# Altium PCB PCB1.PcbDoc
Units mm, origin at the board's own origin, x right, y up, seen from the top; angles counter-clockwise.
Board outline 26.04 x 30.99 mm, 2 copper layers (Top Layer, Bottom Layer); 13 components, 11 nets, 60 pads, 12 vias.
Unrouted connection lines stored in the file: 1.
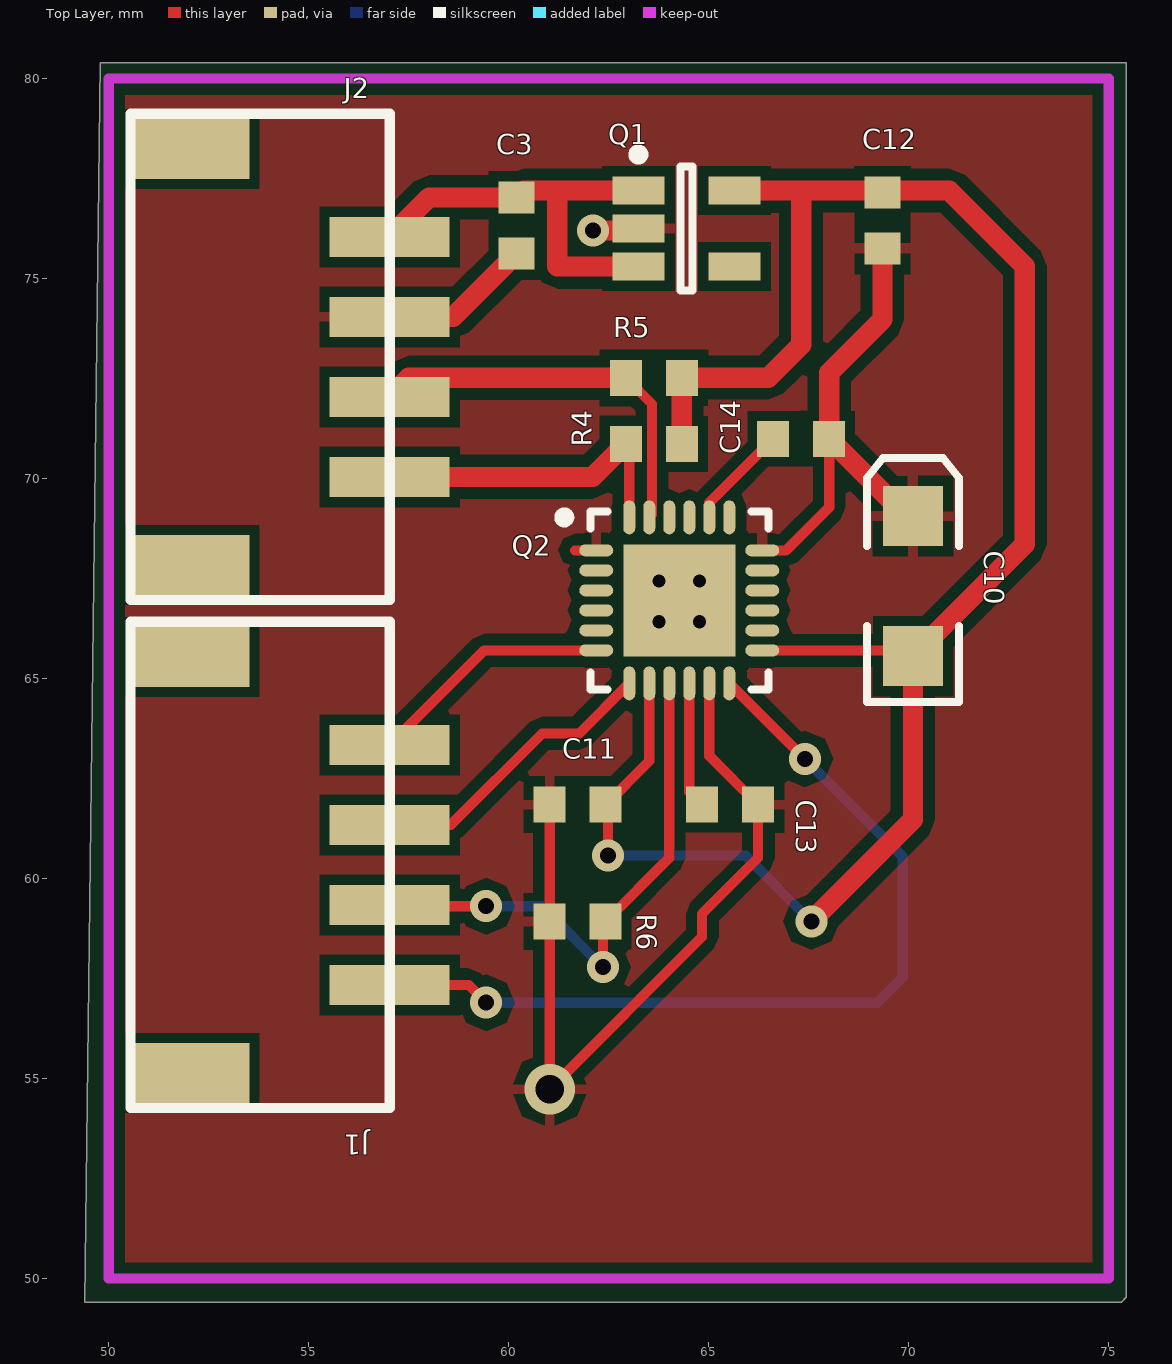
[diagram p0: Top Layer view]
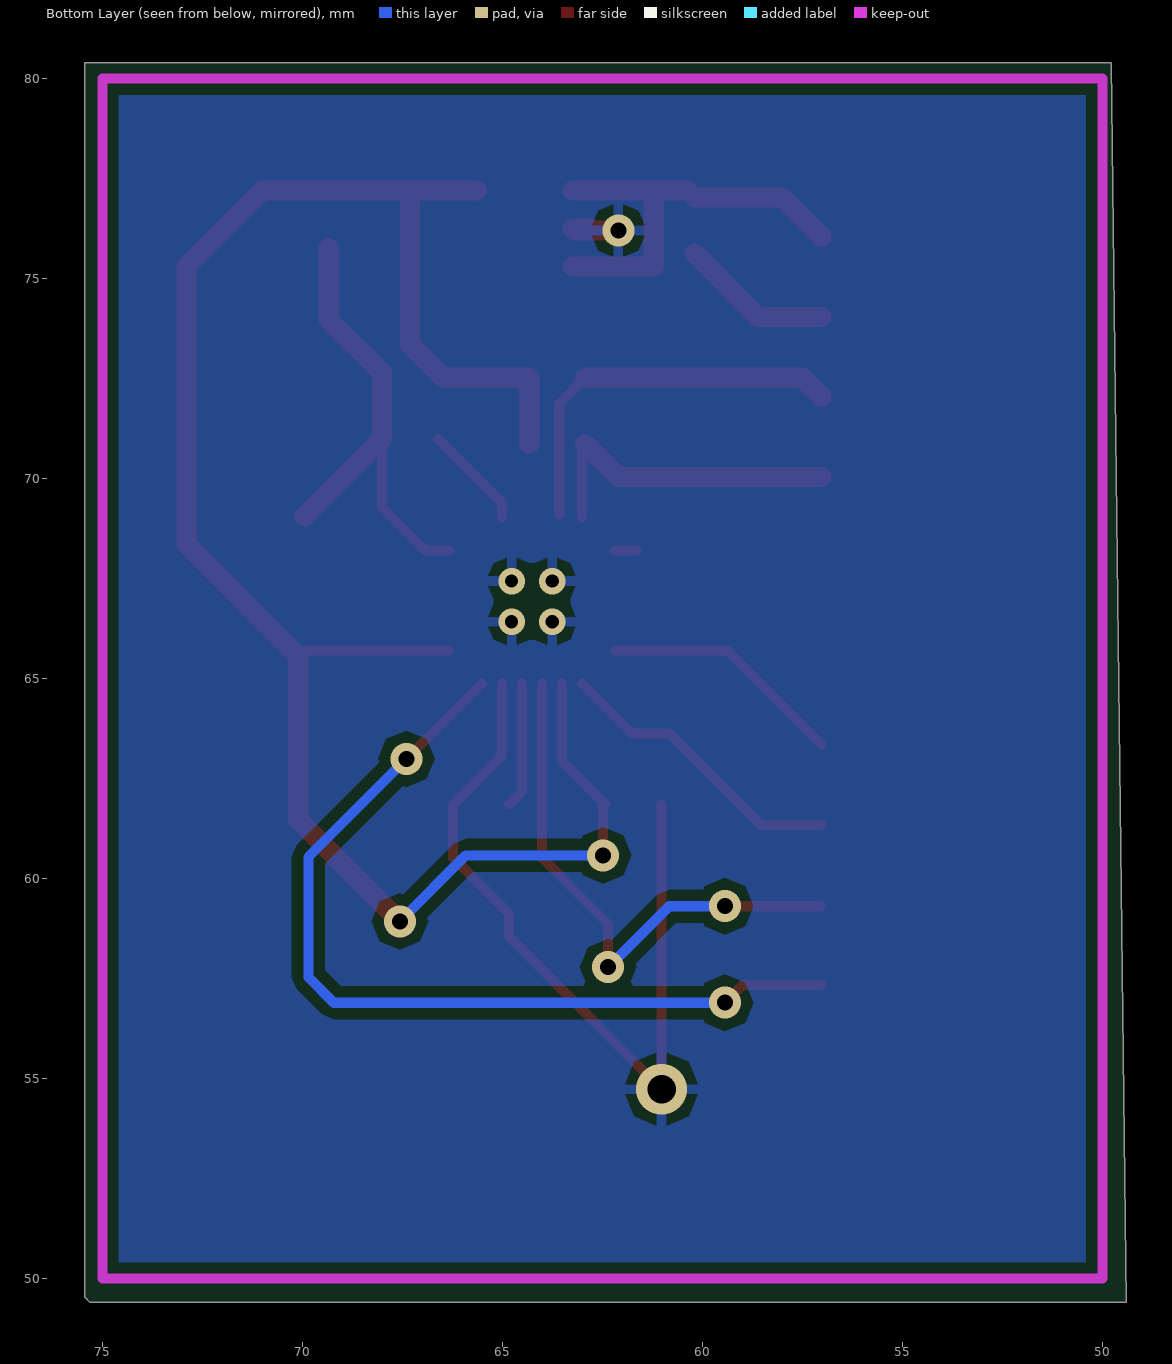
[diagram p1: Bottom Layer view, seen from below]

## Layer stack, top to bottom
Top Layer: signal copper 0.0356
Dielectric: dielectric 0.32, FR-4, Dk 4.8
Bottom Layer: signal copper 0.0356

## Board outline
49.784,80.391 75.438,80.391 75.438,49.53 75.311,49.403 49.403,49.403

## Design rules (kind name [scope] priority, off if disabled: settings)
Clearance [All] p1 off: gap=0.254
ComponentClearance [All] p1 off: gap=0 collisioncheckmode=3 verticalgap=0 showdistances=FALSE
Height [All] p1 off: minheight=0 maxheight=25.4 prefheight=12.7
PolygonConnect [All] p1: connectstyle=Relief reliefconductorwidth=0.254 reliefentries=4 polygonreliefangle="90 Angle"
RoutingVias [All] p1: holewidth=0.711 width=1.27 viastyle="Through Hole" minholewidth=0.711 minwidth=1.27 maxholewidth=0.711 maxwidth=1.27
SilkscreenOverComponentPads [All] p1: minsilkscreentomaskgap=0.254
SolderMaskExpansion [All] p1: expansion=0.102
Width [All] p1: maxlimit=1.27 minlimit=0.254 preferedwidth=0.254
25 further rules are at their usual default settings.

## Components (designator, comment, footprint, x,y, rotation, side; value= is the part's Value field where it differs from the comment)
C3 "4.7u" 1608[0603] 60.198,76.327 r270 top
C10 "10u" 3.2X1.6X1.1 70.104,67.31 r90 top
C11 "0.1u" 1608[0603] 61.722,61.849 r0 top
C12 "0.1u" 1608[0603] 69.342,76.454 r270 top
C13 "0.1u" 1608[0603] 65.532,61.849 r0 top
C14 "2200p" 1608[0603] 67.31,70.993 r0 top
J1 "CON1" SH-3 57.023,61.341 r270 top
J2 "CON2" SH-3 57.023,74.041 r270 top
Q1 "3.3V  LDO" SOT235 63.246,78.105 r0 top (schematic designator *)
Q2 "Component_1" MPU6050 64.262,66.929 r0 top (schematic designator *)
R4 "4.7K" 1608[0603] 63.627,70.866 r0 top
R5 "4.7K" 1608[0603] 63.627,72.517 r0 top
R6 "4.7K" 1608[0603] 61.722,58.928 r0 top

## Footprints (in the part's own frame and the unit in brackets; to place one, negate y for a bottom-side part, rotate by r counter-clockwise, add the part's x,y. Pads: shape width x height; smd on the part's side, far side on the other; paste and mask are expansions set on the pad)
3.2X1.6X1.1 [mm] "SMT LED; 2 Flat Leads"
  rect 1.5x1.5 smd: 1(-1.75,0) 2(1.75,0)
  silkscreen extent -2.9,-1.15 3.2,1.15
1608[0603] [mm] "Chip Capacitor, Body 1.6x0.8mm, IPC High Density"
  rect 0.8x0.9 smd: 1(-0.7,0) 2(0.7,0)
  body extent -0.87,-0.48 0.87,0.48, height 1.3
MPU6050 [mm]
  oval 0.85x0.3 smd: 1(-2.075,1.275) 2(-2.075,0.775) 3(-2.075,0.275) 4(-2.075,-0.225) 5(-2.075,-0.725) 6(-2.075,-1.225) 13(2.075,-1.225) 14(2.075,-0.725) 15(2.075,-0.225) 16(2.075,0.275) 17(2.075,0.775) 18(2.075,1.275)
  oval 0.3x0.85 smd: 7(-1.25,-2.05) 8(-0.75,-2.05) 9(-0.25,-2.05) 10(0.25,-2.05) 11(0.75,-2.05) 12(1.25,-2.05) 19(1.25,2.1) 20(0.75,2.1) 21(0.25,2.1) 22(-0.25,2.1) 23(-0.75,2.1) 24(-1.25,2.1)
  rect 2.8x2.8 smd: 25(0,0.025)
  silkscreen extent -3,-2.2 2.22,2.25, body extent -2.07,-2.05 2.07,2.1, height 1
SH-3 [mm]
  rect 1x3 smd: 1(-2,0) 2(0,0) 3(2,0) 4(4,0)
  rect 1.5x3 smd: GND(-4.2,-5) GND(6.2,-5)
  silkscreen extent -5.08,-6.48 7.08,0
SOT235 [mm]
  rect 1.3x0.7 smd: 1(-0.006,-0.904) 2(-0.006,-1.854) 3(-0.006,-2.804) 4(2.394,-2.804) 5(2.394,-0.904)
  silkscreen extent -0.13,-3.4 1.34,0.12, body extent 0.29,-3.4 2.09,-0.3, height 1.45

## Part data
C3 C10 C11 C12 C13 C14: library part CAP-0.1UF, "SMD-CAP"
J1 J2: library part "Header 4", "Header, 4"
Q1: library part 3.3V
Q2: library part Compone
R4 R5 R6: library part Res1, "Resistor"

## Via types
v1: diameter 0.8, hole 0.4, Top Layer to Bottom Layer, 7 vias
v2: diameter 0.66, hole 0.33, Top Layer to Bottom Layer, 4 vias
v3: diameter 1.27, hole 0.711, Top Layer to Bottom Layer, 1 vias

## Nets (pads, with @x,y where several pads share a name; then routed paths per layer and width w, separated by ;. In a path a pad name is that pad's centre, name@x,y a point inside that pad or via, vN(x,y) a via of type N, cw(c..) or ccw(c..) an arc to the next point about the centre after c; other vN are vias at no path point)
AD0: J1.3 Q2.9 R6.2 | length 13.6
  Top Layer w0.254: J1.3@57.055,59.309 v1(59.436,59.309) ; v1(62.357,57.785) R6.2@62.357,58.863 ; R6.2 64.012,60.518 Q2.9
  Bottom Layer w0.254: v1(59.436,59.309) 60.833,59.309 v1(62.357,57.785)
GND: C3.2 C10.2 C11.1 C12.2 C13.2 C14.2 J2.2 Q1.2 Q2.1 Q2.11 Q2.18 Q2.25 R6.1 | length 37.7
  Top Layer w0.254: C11.1 R6.1 v3(61.022,54.734) 64.832,58.544 64.832,59.117 66.232,60.517 C13.2 65.012,63.069 Q2.11 ; 61.654,68.204 Q2.1 ; Q2.18 66.934,68.204 68.01,69.28 C14.2
  Top Layer w0.508: J2.2 58.612,74.041 C3.2 ; v1(62.103,76.2) Q1.2@63.189,76.2 ; Q1.2@62.808,76.251 Q1.2 ; C12.2 69.342,73.976 68.01,72.644 C14.2 C10.2@69.943,69.06
  other v2: 63.754,66.421 64.77,66.421 63.754,67.437 64.77,67.437
INT: J1.4 Q2.12 | length 22.4
  Top Layer w0.254: J1.4 58.991,57.341 v1(59.436,56.896) ; Q2.12 v1(67.399,62.992)
  Bottom Layer w0.254: v1(59.436,56.896) 69.215,56.896 69.85,57.531 69.85,60.541 v1(67.399,62.992)
Net*_10: C13.1 Q2.10 | length 3.2
  Top Layer w0.254: Q2.10 64.512,62.169 C13.1
Net*_20: C14.1 Q2.20 | length 2.6
  Top Layer w0.254: Q2.20 65.012,69.395 C14.1
SCL: J2.3 Q2.23 R5.1 | length 9.8
  Top Layer w0.254: R5.1 63.581,71.863 Q2.23@63.581,69.098
  Top Layer w0.508: J2.3 57.499,72.517 R5.1
SDA: J2.4 Q2.24 R4.1 | length 8
  Top Layer w0.254: Q2.24 R4.1@63.012,70.781
  Top Layer w0.508: J2.4 62.102,70.041 R4.1
VCC_3.3V: C10.1 C11.2 C12.1 Q1.5 Q2.8 Q2.13 R4.2 R5.2 | length 49.8
  Top Layer w0.254: C11.2 63.512,62.939 Q2.8 ; v1(62.484,60.579) C11.2@62.484,61.787 ; Q2.13 69.96,65.704 C10.1 ; C12.1@69.295,77.201 C12.1
  Top Layer w0.508: R4.2 R5.2 66.483,72.517 67.31,73.344 67.31,77.201 ; Q1.5 67.31,77.201 ; v1(67.564,58.928) 70.104,61.468 C10.1 72.898,68.354 72.898,75.311 71.008,77.201 69.295,77.201 67.31,77.201
  Bottom Layer w0.254: v1(62.484,60.579) 65.913,60.579 v1(67.564,58.928)
VCC_5V: C3.1 J2.1 Q1.1 Q1.3 | length 10.6
  Top Layer w0.254: C3.1 C3.1@60.372,77.201
  Top Layer w0.508: J2.1 58.009,77.027 C3.1 ; C3.1@60.372,77.201 61.214,77.201 ; Q1.3 61.224,75.301 61.214,75.311 61.214,77.201 ; Q1.1 61.214,77.201
XCL: J1.2 Q2.7 | length 7.5
  Top Layer w0.254: J1.2 58.547,61.341 60.833,63.627 61.76,63.627 Q2.7
XDA: J1.1 Q2.6 | length 6.1
  Top Layer w0.254: J1.1 59.386,65.704 Q2.6
pads on no net: J1.GND J2.GND Q1.4 Q2.2 Q2.3 Q2.4 Q2.5 Q2.14 Q2.15 Q2.16 Q2.17 Q2.19 Q2.21 Q2.22

## Polygon pours and split planes (outlines as drawn)
GND on Bottom Layer "Top Layer-No Net" (solid, pour order 26): 50,80 74.813,80 75.184,79.629 75,79.445 75,50.165 50,50.165
GND on Top Layer "Top Layer-No Net" (solid, pour order 28): 50,80 75,80 75,50 50,50

## Keep-outs
Keep-Out Layer:
  lines w0.254: 50,50 75,50 75,80 50,80 50,50